# Altium PCB SEC(70x35mm).PcbDoc (part 2 of 2)
Units mil, origin at the board's own origin, x right, y up, seen from the top; angles counter-clockwise.
Board outline 2767.39 x 1392.75 mil, 4 copper layers (Top Layer, GND, POWER, Bottom Layer), stack 25.134 mil thick; 146 components, 106 nets, 504 pads, 259 vias.
Unrouted connection lines stored in the file: 8.
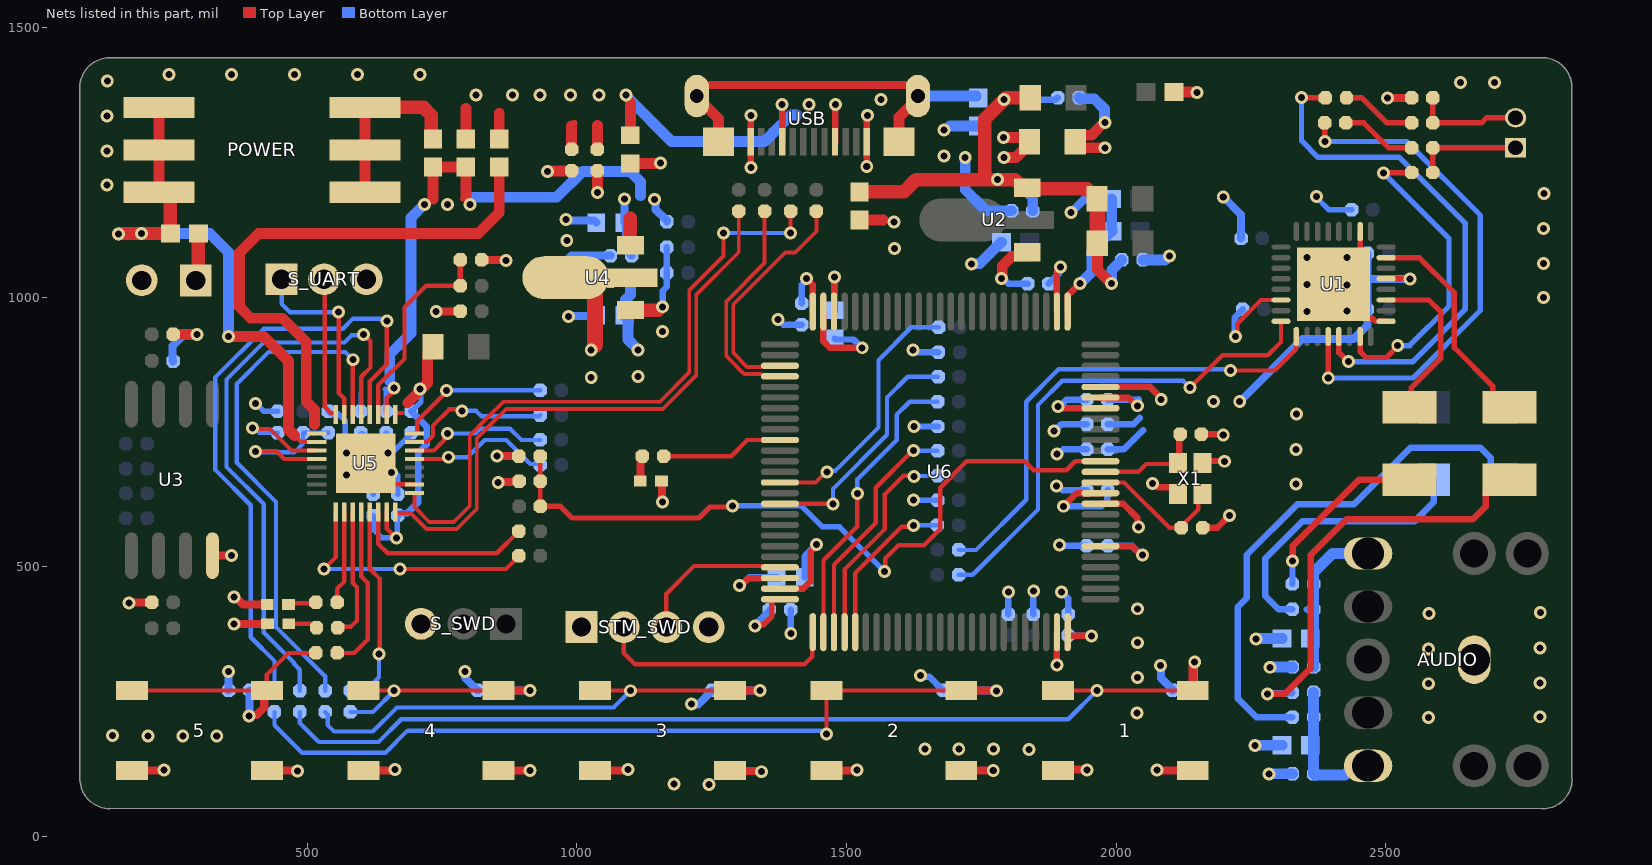
[diagram p4: the nets of this part, all layers, seen from the top]

## Via types
v1: diameter 24, hole 13, Top Layer to Bottom Layer, 259 vias

## Nets (pads, with @x,y where several pads share a name; then routed paths per layer and width w, separated by ;. In a path a pad name is that pad's centre, name@x,y a point inside that pad or via, vN(x,y) a via of type N, cw(c..) or ccw(c..) an arc to the next point about the centre after c; other vN are vias at no path point) (continued)
GND: 1.3 1.4 2.3 2.4 3.3 3.4 4.3 4.4 5.3 5.4 BAT.2 C8.2 C9.2 C10.2 C11.2 C12.2 C13.2 C14.2 C15.2 C16.2 C17.2 C18.2 C19.2 C20.1 C21.1 C22.2 C23.2 C24.1 C25.2 C26.2 C27.2 C28.2 C29.2 C30.2 C31.2 C32.2 C33.2 C34.2 C35.2 C36.2 C37.2 C38.2 C39.2 C40.2 C41.2 C42.2 C43.2 C44.2 C45.2 C46.2 C47.2 C48.2 C49.2 C50.2 FB1.1 LED2.2 LED3.2 LED4.2 R2.2 R15.2 R16.2 R25.2 R26.1 R29.1 R35.2 R47.2 R56.1 R61.2 R63.2 S_SWD.3 S_UART.3 STM_SWD.1 U1.6 U1.21 U2.1 U3.4 U4.1 U5.18 U5.33 U6.10 U6.19 U6.26 U6.49 U6.74 U6.99 USB.A1 USB.A12 X1.2 X1.4 | length 5663.3
  Top Layer w8: U5.33@647.37,652.63 U5.18@698.55,652.63 ; v1(2221.37,926.56) 2224.43,929.62 2224.43,950.43 2268.47,994.47 U1.6@2305.56,994.47
  Top Layer w10: U5.33@608,692 U5.33@647.37,652.63 ; v1(739,973) v1@739.5,973.5 ; C25.2@783.12,973.5 C25.2@783.62,974 ; v1(945,1233) v1@945.82,1233.82 ; C23.2@989.18,1233.82 C23.2@990,1234.64 ; v1@1322,1334 v1@1322.2,1333.8 ; v1@1322.2,1241.17 v1@1322.36,1241 ; v1@1537,1330 v1@1537.2,1329.8 ; U1.21@2500.44,1033.84 v1(2545,1033.84)
  Top Layer w12: v1@1322.2,1241.17 USB.A1@1322.2,1287.74 v1@1322.2,1333.8 ; U6.74@1376.28,459.33 1419.33,459.33 1433.55,473.55 1433.55,528.08 1443.79,538.31 v1(1443.79,541.11) ; U6.49@1456.99,973.1 1456.99,918.01 1469,906 v1(1529,906) ; v1@1537.2,1247.75 USB.A12@1537.2,1287.74 v1@1537.2,1329.8 ; FB1.1@1831.35,1296 FB1.1@1839.35,1288 ; v1@1890.06,316.41 U6.99@1890.06,378.62 ; v1(1892,797) 1895.25,797 1898.28,793.97 U6.19@1970.77,793.97 ; U6.26@1909.75,973.1 1909.75,1002.44 1932.3,1025 v1(1933.12,1025) ; U6.10@1970.77,616.81 1970.86,616.71 2013.1,616.71 2039.44,590.37 v1@2039.44,576.61 ; v1(2067,654) 2070.25,654 2076.55,647.7 2103.9,647.7 2114.63,636.97 X1.2@2114.63,635 ; C33.2@2158,746 v1@2197,746 ; X1.4@2159.9,692.09 2163.82,696 v1@2202,696 ; C32.2@2160.38,572.44 2187.44,572.44 v1(2210,595)
  Top Layer w15: v1@167,434 R26.1@211.62,434 ; 5.3@175.09,122 v1@231,122 ; U3.4@324,520.51 v1@364,520.51 ; v1(364,394) LED3.2@426,394 ; v1(364,444) 366.44,444 380.44,430 LED2.2@425.63,430 ; 5.4@425,122 477,122 v1@478,123 ; 4.3@604.32,122 v1@656.28,122 ; v1@739.5,973.5 C25.2@783.12,973.5 ; R47.2@823,1069 v1@864.98,1069 ; v1(854,656) 855.37,657.37 891.25,657.37 R61.2@892.62,658.74 ; 4.4@854.23,122 905.19,122 v1@906,122.81 ; 3.3@1033.55,122 1092.17,122 v1@1093.17,123 ; v1@1150.5,976 1156.5,982 v1(1158.94,982) ; LED4.2@1156.92,658.87 1157.66,658.14 1157.66,620.73 v1(1158.39,620) ; 3.4@1283.45,122 1284.64,120.81 v1@1338,120.81 ; 2.3@1462.77,122 v1@1516.04,122 ; 2.4@1712.68,122 1767.81,122 v1@1769,120.81 ; 1.3@1892,122 1893.62,123.62 v1@1941,123.62 ; v1@2080,122.62 2080.62,122 1.4@2141.91,122
  Top Layer w20: R25.2@251,931 v1@288,931 ; v1@945.82,1233.82 C23.2@989.18,1233.82 ; v1(1038,1194.2) C22.2@1038,1234.64 ; C24.1@1099,1247.75 v1@1152.19,1247.75 ; v1@1788.72,1034.45 1787.77,1035.41 1787.77,1036.3 1788.72,1037.25 1788.72,1057.72 1806.79,1075.79 1837,1075.79 U2.1@1844,1082.79 ; v1(1791,1296) FB1.1@1831.35,1296 ; v1(1791.63,1259) 1814.29,1259 1839.35,1284.06 FB1.1@1839.35,1288
  Top Layer w25: U4.1@1099,976 v1@1150.5,976
  Bottom Layer w10: v1(404,803) 418.65,788.35 444.65,788.35 R35.2@445,788 ; C26.2@539,788 543.18,783.82 557.18,783.82 570.19,770.81 570.19,713.22 v1(572.59,710.81) 576.38,710.81 582.24,716.67 586,716.67 ; C29.2@622,634 622,666.26 ; v1@646,710.74 646.91,711.65 646.91,717.28 646,718.19 C28.2@646,747.36 ; 662.72,716.6 C31.2@693,746.88 ; C30.2@668,634.38 668,670.1 ; v1@1624.24,623 R16.2@1668.62,623 ; v1(1681,1310) 1684.79,1310 1691.79,1317 ; 2465.62,1034.45 2466.23,1033.84
  Bottom Layer w12: v1(1158.94,982) 1158.94,1011.45 1166.62,1019.14 C45.2@1166.62,1045 R56.1@1166.62,1092 ; v1@1374,957 1382.26,948.74 C44.2@1416.69,948.74 ; v1@1396,378 1396.38,378.38 C39.2@1396.38,420.43 ; C35.2@1422.36,480.43 1422.36,519.69 v1(1443.79,541.11) ; C34.2@1477.69,923.17 1479.56,921.31 1512.69,921.31 1528,906 v1(1529,906) ; v1(1622.93,902) 1626.18,902 1630.18,898 R2.2@1670.31,898 ; v1(1625,760) R15.2@1668.62,760 ; v1(1637,298) 1639.3,295.7 1653.67,295.7 C47.2@1678.9,270.47 ; v1(1787,1034.45) 1790.25,1034.45 1799.7,1025 C43.2@1835.62,1025 ; R63.2@1800,412 v1@1800,452 ; v1@1887.31,753.06 1898.67,764.43 C37.2@1945.31,764.43 ; v1(1889,650) 1892.25,650 1900.82,641.43 C42.2@1945.31,641.43 ; v1(1890,709) 1893.25,709 1901.67,717.43 C38.2@1945.31,717.43 ; v1(1892,797) 1895.25,797 1908.25,810 C36.2@1945.31,810 ; v1@1898.67,538.43 C41.2@1945.31,538.43 ; v1@1900,452 1910.69,441.31 C40.2@1910.69,412 ; v1(2221.37,926.56) 2220,927.93 2220,962 2234.31,976.31 C9.2@2234.31,977
  Bottom Layer w15: C17.2@251,881 250,882 250,909 269.97,928.97 291.3,928.97 293.29,930.96 v1(295.72,930.96) ; C50.2@354,270.47 v1@354,305 ; 600.76,710.81 600.76,743.62 601.16,744.02 C27.2@602.24,744.02 ; v1@792,305 792,294.47 C49.2@815.99,270.47 ; v1(980,1144) 981.72,1142.28 1031.47,1142.28 C21.1@1035.75,1138 ; v1(984.4,964.06) 985.37,965.03 1034.78,965.03 C20.1@1035.75,966 ; 984.4,1071.74 989.66,1077 C19.2@1061.99,1077 ; 1006,1039 1012,1039 1022,1029 C18.2@1061.99,1029 ; v1@1212,245 1225.15,245 C48.2@1250.62,270.47 ; v1(1916,1157) 1941,1182 C11.2@1991,1182 ; v1@2083,313 2083,293.95 2104.62,272.33 C46.2@2104.62,270.47 ; v1(2198.44,1185.94) 2231.62,1152.75 C16.2@2231.62,1109 ; v1(2229,806) 2345,922 2439.78,922 2465.62,947.84 C13.2@2465.62,977 2465.62,1034.45 C12.2@2465.62,1081 ; 2466.23,1033.84 v1(2545,1033.84)
  Bottom Layer w20: 1691.79,1317 R29.1@1744,1317 ; v1(1720,1259) 1720,1199.06 1752.09,1166.97 1759.06,1160 C14.2@1805.99,1160 ; v1(1732,1061) 1732.77,1061.77 1746.48,1061.77 1786.5,1101.79 C15.2@1787,1101.79 ; v1(1933.12,1025) 1954.44,1046.32 1954.44,1084.94 1991.5,1122 C10.2@1992,1122 ; C11.2@1991,1182 1991.5,1181.5 C10.2@1991.5,1122.5 ; C8.2@2049.69,1069 2090.42,1069 2097.29,1075.87 v1(2098.37,1075.87)
  other v1: 1245,96 1179.69,96.75 1341.91,119.81 481.59,120.81 912.59,121.81 1771.94,121.76 234.59,122.81 1519.59,122.62 1945.59,122.62 2075.59,122.62 662.71,123.62 1094.59,123.62 1838,161.22 1645,161.97 1708,161.97 1772.69,161.97 204.31,186.12 269,186.12 332,186.12 139,186.86 2038.44,229 1212.06,245.37 2039.18,294.31 354.06,305.37 792.06,305.37 2082.34,316.41 1890.44,317.86 2039.18,359 1396.44,376.45 2039.18,422 169.59,432.81 1800.44,453.45 1898.44,453.45 359.59,520.81 1894.88,539.87 2041.44,573.88 1624.03,623.45 572.18,669.81 656.28,674.97 2200.44,695.53 649.59,710.81 2198.44,744.45 1884.75,751.45 2180,806 1158.94,936 1372.44,958.45 868.59,1067.81 981.07,1104.97 128.25,1208 1322.36,1240.13 1537.36,1242.13 1154.59,1248.34 1681,1262 128.25,1271 128.25,1335.69 1322.36,1337.13 1538.36,1337.13 1563.86,1366.61 129,1401 243.21,1413.05 359.71,1413.05 476.21,1413.05 592.71,1413.05 709.21,1413.05
GND_SIGNAL: AUDIO.1 C1.2 C2.2 C3.2 D1.1 D2.1 FB1.2 R8.2 R9.2 R14.1 U1.17 U1.26 U1.33 | length 787.2
  Top Layer w10: U1.26@2452.21,1121.44 2452.21,1073.21 U1.33@2403,1024 2465.91,961.09 2471.69,961.09 2471.77,961 2474.9,961 2480.8,955.1 U1.17@2500.44,955.1
  Top Layer w12: FB1.2@1924,1288 FB1.2@1935.11,1276.89
  Top Layer w15: v1@2505.11,1369.31 R14.1@2547.62,1369.31
  Top Layer w20: FB1.2@1924,1288 1924,1290.31 1933.69,1300 1953.92,1300 1977.92,1324 v1(1979,1324) ; FB1.2@1935.11,1276.89 v1(1979,1276.89) ; C3.2@2107,1380.4 2146.74,1380.4 v1@2148,1379.14
  Bottom Layer w10: v1@2370,1186 2394,1162 C2.2@2436.62,1162
  Bottom Layer w20: C1.2@1931.01,1370 1933.12,1367.89 1959.11,1367.89 1978.23,1348.77 1978.23,1324.77 v1(1979,1324) ; v1@2259.5,169 D2.1@2307.69,169 ; v1@2262,366.71 2307.4,366.71 D1.1@2307.69,367 ; v1@2285.5,116 R9.2@2326.68,116 ; v1@2291,314 R8.2@2326.68,314
  other v1: 2283.01,115.52 2257.01,168.52 2579.25,220 2785.56,221.73 2579.25,283 2785.56,284.73 2285.5,313.52 2579.25,347.69 2785.56,349.42 2259.5,366.23 2580,413 2786.3,414.73 2333.25,653 2333.25,717.69 2334,783 2353.95,973.3 2427.95,974.3 2792.58,999.36 2427.95,1022.3 2353.95,1023.76 2792.58,1062.36 2353.95,1073.3 2427.95,1073.3 2792.58,1127.05 2371.5,1186.52 2793.32,1192.36 2502.62,1368.82 2150,1379 2638.4,1398.28 2701.4,1398.28
GPIO1: R41.1 U5.29 | length 1083
  Top Layer w8: U5.29@600.13,782.55 600.13,852.39 617,869.26 617,918.19 v1(604.23,930.96)
  Bottom Layer w8: R41.1@486,270 486,309 476,319 476,321 419,378 419,616 350,685 350,847 418.81,915.81 568.81,915.81 581.97,928.97 602.24,928.97 v1(604.23,930.96)
GPIO2: R43.1 U5.28 | length 1178.2
  Top Layer w8: U5.28@615.87,782.55 615.87,843.46 647.37,874.96 v1(647.37,956)
  Bottom Layer w8: R43.1@439,270 439,325 395,369 395,614 329,680 329,851 419,941 565.78,941 584.78,960 634.68,960 635.62,959.06 644.31,959.06 v1(647.37,956)
GPIO3: R46.1 U5.30 | length 983.9
  Top Layer w8: U5.30@584.38,782.55 v1(584.38,883.81)
  Bottom Layer w8: R46.1@533,270 533,297 442,388 442,620 369,693 369,839 428,898 570.19,898 v1(584.38,883.81)
GPIO4: R49.1 U5.13 | length 381.3
  Top Layer w8: U5.13@615.87,601.45 615.87,496.13 634,478 v1@634,334
  Bottom Layer w8: R49.1@580,270 608,270 633,295 v1(633,338)
GPIO5: R51.1 U5.12 | length 308.3
  Top Layer w8: R51.1@555.38,340 587,340 612,365 612,470 600.13,481.87 U5.12@600.13,601.45
I2S3_CK: R54.2 U6.78 | length 443.2
  Top Layer w8: U6.78@1476.67,378.62 1476.67,503.67 1554,581 1554,646.49 1622.72,715.21 v1(1624.45,715.21)
  Bottom Layer w8: v1(1624.45,715.21) 1624.75,714.91 1668.32,714.91 R54.2@1668.62,714.6
I2S3_MCK: R58.2 U6.64 | length 481
  Top Layer w8: U6.64@1376.28,656.18 1442.19,656.18 v1@1459.02,673
  Bottom Layer w8: v1(1463.75,675.61) 1466.29,678.15 1479.15,678.15 1559,758 1559,883 1620,944 R58.2@1670.62,944
I2S3_nRESET: R59.2 U6.66 | length 446.2
  Top Layer w8: U6.66@1376.28,616.81 v1@1473,616.81
  Bottom Layer w8: v1(1474.74,616.61) 1474.74,644.32 1575,744.58 1575,814 1613.4,852.4 R59.2@1669.62,852.4
I2S3_SDI: R55.2 U6.79 | length 401.2
  Top Layer w8: U6.79@1496.36,378.62 1496.36,495 1571,569.64 1571,634.18 1605.2,668.38 v1@1627,668.38
  Bottom Layer w8: v1(1624.74,667.29) 1625.59,668.15 1667.77,668.15 R55.2@1668.62,669
I2S3_SDO: R57.2 U6.80 | length 300.2
  Top Layer w8: U6.80@1516.04,378.62 1516.04,488.04 1602,574 v1@1627,574
  Bottom Layer w8: v1(1624.24,576.61) 1624.43,576.81 1668.12,576.81 R57.2@1668.31,577
I2S3_WS: R53.2 U6.77 | length 545.3
  Top Layer w8: U6.77@1456.99,378.62 1456.99,511.99 1520,575 v1(1520,636)
  Bottom Layer w8: v1(1520,636) 1520,662 1593,735 1593,782 1617,806 R53.2@1668.62,806
LED: R65.1 U6.60 | length 230.3
  Top Layer w8: R65.1@1158.39,705 R65.1@1160.69,705 1286,705 1315.92,734.92 U6.60@1376.28,734.92
LEFT_OUT: AUDIO.2 D1.2 R1.2 R7.2 R8.1 | length 296.4
  Bottom Layer w10: 2351.9,421 R1.2@2353.69,419.21 ; 2353.34,421 R1.2@2353.69,421.34 ; AUDIO.2@2465.21,526.21 AUDIO.2@2467,524.43
  Bottom Layer w20: R8.1@2366.05,314 R1.2@2366.05,421 R7.2@2366.05,468 2366.05,489.39 2401.09,524.43 AUDIO.2@2467,524.43
Net1_1: 1.1 1.2 C46.1 R41.2 | length 1911.4
  Top Layer w8: 1.1@1891.91,270.47 v1(1964.35,270.47) 1.2@2141.91,270.47
  Top Layer w15: 1.2@2141.91,270.47 2141.91,317.3 2145.54,320.94 v1(2145.54,323.37)
  Bottom Layer w8: R41.2@486,230.62 486,210 521,175 632,175 674,217 1910.88,217 v1(1964.35,270.47)
  Bottom Layer w15: v1@2143,324 2144,323 C46.1@2144,270.47
Net2_1: 2.1 2.2 C47.1 R43.2 | length 1542.7
  Top Layer w8: v1@1463,190 1462.68,190.32 2.1@1462.68,270.47 2.2@1712.68,270.47
  Top Layer w15: 2.2@1712.68,270.47 1775.53,270.47 v1@1776,270
  Bottom Layer w8: R43.2@439,230.62 439,206 490,155 645,155 686,196 1452.44,196 1458.44,190 v1(1462.77,190)
  Bottom Layer w15: C47.1@1718.28,270.47 1718.55,270.2 1777.33,270.2 v1(1777.6,269.93)
Net3_1: 3.1 3.2 C48.1 R46.2 | length 981.5
  Top Layer w8: 3.1@1033.45,270.47 3.2@1283.45,270.47
  Top Layer w15: 3.2@1283.45,270.47 1283.61,270.31 1338.9,270.31 v1(1339.06,270.16)
  Bottom Layer w8: R46.2@533,230.62 537.59,226.03 537.59,206.41 549.69,194.31 621.31,194.31 666,239 1068,239 v1(1099,270)
  Bottom Layer w15: C48.1@1290,270.47 v1@1341.91,270.47
Net4_1: 4.1 4.2 C49.1 R49.2 | length 460.6
  Top Layer w8: 4.1@604.23,270.47 4.2@854.23,270.47
  Top Layer w15: 4.2@854.23,270.47 854.28,270.42 912.6,270.42 v1(912.65,270.37)
  Bottom Layer w8: R49.2@580,230.62 621.62,230.62 v1(661,270)
  Bottom Layer w15: C49.1@855.37,270.47 909.53,270.47 v1@910,270
Net5_1: 5.1 5.2 C50.1 R51.2 | length 503.3
  Top Layer w8: 5.1@175,270.47 5.2@425,270.47 425,300 465,340 R51.2@516,340
  Top Layer w15: v1(392,223) 393.72,224.72 405.72,224.72 420.04,239.04 420.04,265.52 5.2@425,270.47
  Bottom Layer w15: v1(392,223) 392.69,223.69 392.69,269.78 C50.1@393.38,270.47
NetBAT_1: BAT.1 R20.2 | length 89.1
  Top Layer w10: BAT.1@293,1031 BAT.1@298,1036
  Top Layer w25: BAT.1@298,1036 R20.2@298,1118
NetC4_2: C4.2 R1.1 | length 527.4
  Bottom Layer w12: R1.1@2326.68,421 2301,421 2276,446 2276,514.87 2345.13,584 2553,584 2589,620 C4.2@2589,661
NetC5_2: C5.2 R6.1 | length 981.6
  Bottom Layer w12: R6.1@2326.68,221 2260,221 2225,256 2225,425 2242,442 2242,522 2336,616 2441,616 2546,721 2675,721 2694.77,701.23 2694.77,682.23 C5.2@2716,661
NetC6_1: C6.1 R12.2 | length 140.7
  Top Layer w10: R12.2@2426,1323 2459,1323 2505.11,1276.89 C6.1@2547.62,1276.89
NetC6_2: C6.2 MIC.1 R11.2 | length 199.4
  Top Layer w10: R11.2@2587,1231 C6.2@2587,1276.89 MIC.1@2740.55,1276.89
NetC7_1: C7.1 R13.2 | length 139.8
  Top Layer w10: R13.2@2427,1369.31 2455.59,1369.31 2501.9,1323 C7.1@2547.62,1323
NetC7_2: C7.2 MIC.2 R14.2 | length 203.9
  Top Layer w10: R14.2@2587,1369.31 C7.2@2587,1323 2677,1323 2686.56,1332.56 MIC.2@2740.65,1332.56
NetC26_1: C26.1 R42.1 U5.4 | length 282.4
  Top Layer w8: v1(404,714) 443,714 457.13,699.87 U5.4@517.45,699.87
  Bottom Layer w8: v1(404,714) 406,712 476,712 492,728 R42.1@492,748.62 C26.1@539,748.62
NetC32_1: C32.1 U6.12 X1.3 | length 263.6
  Top Layer w8: U6.12@1970.77,656.18 2014.63,656.18 2098.37,572.44 C32.1@2121,572.44 2121,575 2152.37,606.37 2152.37,627.47 X1.3@2159.9,635
NetC33_1: C33.1 U6.13 X1.1 | length 206.1
  Top Layer w8: U6.13@1970.77,675.86 2040.86,675.86 2055.54,690.54 2113.08,690.54 X1.1@2114.63,692.09
  Top Layer w12: X1.1@2114.63,692.09 2116.62,694.08 2116.62,744 C33.1@2118.62,746
NetC34_1: C34.1 U6.48 | length 125
  Top Layer w12: U6.48@1476.67,973.1 v1@1476.67,1036
  Bottom Layer w12: v1(1477.44,1037.45) 1477.57,1037.32 1477.57,975.55 C34.1@1477.69,975.43
NetC35_1: C35.1 U6.73 | length 155.3
  Top Layer w12: v1(1301.44,465.45) 1304.69,465.45 1318.25,479.01 U6.73@1376.28,479.01
  Bottom Layer w12: v1(1301.44,465.45) 1304.69,465.45 1319.66,480.43 C35.1@1370.11,480.43
NetCT1_1: CT1.1 U1.19 | length 311
  Top Layer w10: U1.19@2500.44,994.47 2579.53,994.47 2602,972 2602,886.88 2547.12,832 2547.12,799.29 CT1.1@2543.83,796
NetCT1_2: CT1.2 R7.1 | length 337.9
  Top Layer w12: v1(2327,510.45) 2327,538 2450,661 CT1.2@2543.83,661
  Bottom Layer w12: R7.1@2326.68,468 2326.84,468.16 2326.84,510.29 v1(2327,510.45)
NetCT2_1: CT2.1 U1.23 | length 411.4
  Top Layer w10: U1.23@2500.44,1073.21 2561.79,1073.21 2627,1008 2627,906 2697.86,835.14 2697.86,821 2722.86,796 CT2.1@2729,796
NetCT2_2: CT2.2 R10.1 | length 799.7
  Top Layer w12: v1@2278.69,264.31 2312.82,264.31 2361,312.5 2361,522 2427,588 2661.48,588 2685,611.52 2685,637 2709,661 CT2.2@2729,661
  Bottom Layer w12: v1(2280.51,263.83) 2282.1,265.42 2325.09,265.42 R10.1@2326.68,267
NetLED2_1: LED2.1 R39.1 | length 52.7
  Top Layer w8: LED2.1@465,430 467,432 514,432 R39.1@516,434
NetLED3_1: LED3.1 R40.1 | length 54.5
  Top Layer w8: LED3.1@465.37,394 506.09,394 513.09,387 R40.1@517,387
NetLED4_1: LED4.1 R65.2 | length 46.5
  Top Layer w15: LED4.1@1117.55,658.87 1117.55,699.39 1118.17,700 1118.17,704.25 R65.2@1117.55,704.86
NetPOWER_3: POWER.3 POWER.4 R28.1 | length 331.9
  Top Layer w10: R28.1@730,1296 R28.1@733,1293
  Top Layer w20: POWER.4@607,1194.2 POWER.4@607,1272.94 POWER.3@607,1351.68
  Top Layer w25: POWER.3@607,1351.68 715.45,1351.68 730,1337.13 R28.1@730,1296
NetR4_2: R4.2 U1.8 | length 939.6
  Top Layer w8: v1(2137,832) 2197,892 2281,892 2305.56,916.56 U1.8@2305.56,955.1
  Bottom Layer w8: R4.2@1707.69,485 1734,485 1855,606 1855,800 1900,845 2124,845 v1(2137,832)
NetR5_2: R5.2 U1.9 | length 911.7
  Top Layer w8: v1(2212,864) 2294,864 2334.1,904.1 U1.9@2334.1,926.56
  Bottom Layer w8: R5.2@1707.69,531 1740,531 1833,624 1833,806 1893,866 2210,866 v1(2212,864)
NetR11_1: R11.1 U1.15 | length 586.1
  Top Layer w10: U1.15@2452.21,926.56 2452.21,898.79 2463,888 2501,888 2522,909 v1(2522,910) ; v1(2496,1230) 2496.5,1230.5 2547.12,1230.5 R11.1@2547.62,1231
  Bottom Layer w10: v1(2496,1230) 2617,1109 2617,983 2544,910 v1(2522,910)
NetR12_1: R12.1 U1.12 | length 966.3
  Top Layer w10: R12.1@2386.62,1323 2386.81,1322.81 2386.81,1288.75 v1(2387,1288.56) ; v1(2393.16,850) U1.12@2393.16,926.56
  Bottom Layer w10: v1(2387,1288.56) 2538.44,1288.56 2675,1152 2675,975 2550,850 v1(2393.16,850)
NetR13_1: R13.1 U1.13 | length 953.8
  Top Layer w10: v1@2344,1369.44 2387.49,1369.44 R13.1@2387.62,1369.31 ; U1.13@2412.84,926.56 2412.84,897.02 v1@2428,881.86
  Bottom Layer w10: v1@2343.5,1366.24 2343.5,1290.05 2374.56,1259 2524.97,1259 2647,1136.97 2647,977 2550.3,880.3 v1(2430.95,880.3)
  other v1: 2343.5,1370.24
NetR29_2: R29.2 USB.1 USB.2 USB.3 USB.4 | length 712.4
  Top Layer w15: USB.4@1222.2,1372.74 1222.2,1379.14 1236.05,1393 1618.34,1393 1632.2,1379.14 USB.3@1632.2,1372.74
  Top Layer w20: USB.4@1234,1359 1262.2,1330.8 USB.2@1262.2,1287.74 ; USB.1@1597.2,1287.74 1597.2,1333.48 USB.3@1622.72,1359
  Bottom Layer w10: R29.2@1740.26,1372.74 R29.2@1744,1369
  Bottom Layer w20: USB.3@1632.2,1372.74 R29.2@1740.26,1372.74
NetR35_1: R35.1 U5.3 | length 187.1
  Top Layer w8: v1(398,757) 399.5,755.5 430.5,755.5 470.38,715.62 U5.3@517.45,715.62
  Bottom Layer w8: v1(398,757) 402.33,757 410.71,748.62 R35.1@445,748.62
NetR36_2: R36.2 U5.23 | length 275.6
  Top Layer w8: U5.23@698.55,731.37 U5.23@698.55,731.37 721.73,731.43 733,742.7 733,761.69 763.37,792.06 783.94,792.06 v1(787,789)
  Bottom Layer w8: v1(787,789) 813,789 823,779 929.62,779 R36.2@931.62,781
NetR37_2: R37.2 U5.24 | length 281.3
  Top Layer w8: U5.24@698.55,747.12 703.94,747.12 704,747.18 704,770.49 758,824.49 v1(758,827)
  Bottom Layer w8: v1(758,827) R37.2@931.62,827
NetR38_2: R38.2 U5.9 | length 485.9
  Top Layer w8: v1(531,495.87) 552.88,517.76 U5.9@552.88,601.45 ; v1(672,495.87) 868.19,495.87 R38.2@892.31,520
  Bottom Layer w8: v1(531,495.87) v1(672,495.87)
NetR44_1: R44.1 R47.1 U5.27 | length 386.7
  Top Layer w8: U5.27@631.62,782.55 631.62,836.67 680,885.05 680,981 720,1021 R44.1@783.62,1021
  Top Layer w10: R44.1@783.62,1021 R47.1@783.62,1069
NetR45_2: R45.2 U5.22 | length 262.2
  Top Layer w8: U5.22@698.55,715.62 734.62,715.62 753.86,734.86 753.86,736.85 759.67,742.66 v1(759.67,746.99)
  Bottom Layer w8: v1(759.67,746.99) 811.25,746.99 820.26,756 876,756 897,735 R45.2@931.62,735
NetR48_2: R48.2 U5.21 | length 266.7
  Top Layer w8: U5.21@698.55,699.87 754.54,699.87 757.67,703 v1(762,703)
  Bottom Layer w8: v1(762,703) 797,703 829,735 869,735 913.45,690.55 930.07,690.55 R48.2@931.62,689
NetR50_2: R50.2 U5.14 | length 343.9
  Top Layer w8: U5.14@631.62,601.45 631.62,542.38 649,525 851.31,525 R50.2@892.31,566
RIGHT_OUT: AUDIO.3 D2.2 R6.2 R9.1 R10.2 | length 259.7
  Bottom Layer w20: R10.2@2366.05,267 R6.2@2366.05,221 2366.05,169 R9.1@2366.05,116 2368.05,114 2424.45,114 2441.18,130.72 AUDIO.3@2467,130.72
SEC_DN: R19.1 U5.17 | length 1188.6
  Top Layer w7: U5.17@698.55,636.88 698.55,610.64 726.23,582.96 771.57,582.96 801,612.38 801,743.38 832.31,774.69 863.3,805.69 1153.55,805.69 1208,860.14 1208,1012.19 1271.69,1075.87 v1(1271.69,1119) ; v1(1396,1119) R19.1@1396,1159.31
  Bottom Layer w7: v1(1271.69,1119) v1(1396,1119)
SEC_DP: R23.1 U5.16 | length 1103.7
  Top Layer w7: U5.16@663.12,601.45 663.12,600.12 663.56,599.68 691.12,599.68 720.85,569.96 776.96,569.96 814,607 814,738 842.51,766.51 868.69,792.69 1158.94,792.69 1221,854.75 1221,1004 1300,1083 R23.1@1300,1159.31
ST_LED1: R39.2 U5.10 | length 172.9
  Top Layer w8: R39.2@555.38,434 555.38,459.38 568.63,472.63 U5.10@568.63,601.45
ST_LED2: R40.2 U5.11 | length 245.6
  Top Layer w8: R40.2@556.38,387 558.26,388.88 580.88,388.88 592,400 592,462 584.38,469.62 U5.11@584.38,601.45
STM_DN: R21.1 U6.53 | length 435.9
  Top Layer w7: U6.53@1375.45,874.93 1372.31,871.79 1342.32,871.79 1341.03,870.5 1315.5,870.5 1290,896 1290,986.62 1386.17,1082.79 1404.79,1082.79 1444,1122 R21.1@1444,1159.31
STM_DP: R27.1 U6.54 | length 412.3
  Top Layer w7: R27.1@1348,1159.31 1348,1063 1277,992 1277,890.62 1283.81,883.81 1306.31,861.31 1310.12,857.5 1340.98,857.5 1344.53,853.95 1374.15,853.95 U6.54@1375.45,855.25
STM_NRST: R34.1 R60.1 R61.1 U6.14 | length 1353.8
  Top Layer w8: R60.1@931.69,705 931.84,704.84 931.84,612.16 R34.1@932,612 ; v1(1570,491) 1571.72,492.72 1571.72,515 1596.72,540 1643.84,540 1673.52,569.68 1673.52,646.49 1722.58,695.55 1830.17,695.55 1846.72,679 1907.45,679 1924,695.55 U6.14@1970.77,695.55
  Top Layer w10: R34.1@932,612 969.52,612 991.15,590.37 1226.31,590.37 1246.57,610.64 v1@1286,610.64
  Bottom Layer w10: v1(1288.44,612.82) 1416.18,612.82 1455,574 1487,574 v1(1570,491)
SWCLK: STM_SWD.2 U6.76 | length 460.1
  Top Layer w8: STM_SWD.2@1086.88,388 1086.88,340 1107.88,319 1422,319 1436.47,333.47 1436.47,345.56 1436.58,345.67 1436.58,381.08 U6.76@1436.47,381.18
SWDIO: STM_SWD.3 U6.72 | length 292.8
  Top Layer w8: STM_SWD.3@1165.62,388 1165.62,449.62 1217.26,501.26 U6.72@1375.45,501.26
UART0_RX: S_UART.2 U5.32 | length 264.7
  Top Layer w8: S_UART.2@531,1033 532.42,1031.58 532.42,796.58 544,785 552.82,785 552.88,784.94 U5.32@552.88,782.55
UART0_TX: S_UART.1 U5.31 | length 351.8
  Top Layer w8: v1(557.87,972.38) 558.26,972 558.26,821.94 568.63,811.57 U5.31@568.63,782.55
  Bottom Layer w8: S_UART.1@452.26,1033 452.26,987.74 468,972 557.49,972 v1(557.87,972.38)
VBAT: POWER.1 POWER.2 R20.1 U5.2 | length 993.1
  Top Layer w8: 476.25,743.25 488.13,731.37 U5.2@517.45,731.37
  Top Layer w10: POWER.2@224.95,1194.2 231.31,1194.2 POWER.2@246,1179.51
  Top Layer w20: POWER.2@224.95,1194.2 POWER.2@224.95,1272.94 POWER.1@224.95,1351.68 ; v1(354,927) 419.31,927 465,881.31 465,754.5 476.25,743.25
  Top Layer w24: v1(150,1117) 151,1118 R20.1@246,1118
  Top Layer w25: R20.1@246,1118 POWER.2@246,1179.51
  Bottom Layer w20: v1(192.59,1117.81) 319.19,1117.81 354,1083 v1(354,927)
VBUS: C22.1 C23.1 C24.2 R17.1 R18.1 USB.A4 USB.A9 | length 784.1
  Top Layer w10: 794,1349.95 798,1353.95 ; 856,1340.84 860,1344.84 ; 990,1317 996,1323 ; 1036,1320 1038,1318 ; USB.A9@1478.56,1287.74 USB.A9@1478.78,1287.96 ; v1@1478.78,1356.78 v1(1479,1357)
  Top Layer w12: USB.A4@1380.83,1287.74 v1@1380.83,1359 ; USB.A9@1478.78,1287.96 v1@1478.78,1356.78
  Top Layer w20: R18.1@794,1293 794,1349.95 ; R17.1@856,1293 856,1340.84 ; C23.1@990,1274.01 990,1317 ; C22.1@1038,1274.01 1038,1318 ; C24.2@1099,1300 1099,1361
  Bottom Layer w20: v1@1094,1370 1175.44,1288.56 1347.56,1288.56 1396.51,1337.51 1408,1337.51
  other v1: 1379.83,1357 1430,1357 812.82,1375 880.59,1375 931.62,1375 988,1375 1041,1375 1091,1375
VCC3.3V: C18.1 C20.2 C36.1 C37.1 C38.1 C39.1 C40.1 C41.1 C42.1 C43.1 C44.1 L2.1 R60.2 R62.2 STM_SWD.4 U4.2 U6.6 U6.11 U6.20 U6.21 U6.27 U6.50 U6.75 U6.100 | length 1660.9
  Top Layer w10: v1(1330,390) 1332.09,392.09 1346.09,392.09 1361.29,407.29 1361.29,438.8 1362.12,439.64 U6.75@1376.28,439.64
  Top Layer w12: v1@1427,1033 1437.3,1022.7 U6.50@1437.3,973.1 ; 1567.82,1143 1571,1146.18 ; v1@1587.5,1138.5 v1(1588,1139) ; U6.27@1890.06,973.1 1890.06,1045.81 1897,1052.75 v1(1897,1056) ; v1@1904,614 1926.4,636.4 1970.67,636.4 U6.11@1970.77,636.49 ; U6.100@1909.75,378.62 1909.75,372.09 1909.84,372 v1@1950,372 ; U6.6@1970.77,538.07 2029.69,538.07 2045.75,522 v1(2049,522) ; U6.20@1970.77,813.66 2022.34,813.66 v1@2036,800 ; U6.21@1970.77,833.34 2062.66,833.34 v1@2087,809
  Top Layer w15: v1(851.31,705) R60.2@892.31,705 ; U4.2@979,1036 1000.18,1036 U4.2@1030.21,1005.97 ; v1(1026.44,902) 1026.44,904.44 v1@1033.45,911.45
  Top Layer w20: L2.1@1524,1143 1567.82,1143
  Top Layer w30: v1@1033.45,911.45 U4.2@1033.45,1025
  Bottom Layer w10: C39.1@1358.61,418.82 1360.01,420.22 C39.1@1360.01,420.43
  Bottom Layer w12: v1(1330,390) 1330,391.71 1357,418.71 C39.1@1357,420.43 ; C44.1@1416.69,988.11 1416.69,1022.46 1425.44,1031.2 v1(1425.44,1034.45) ; R62.2@1846,412 1846.5,412.5 1846.5,454.5 v1(1847,455) ; C43.1@1875,1025 1894.7,1044.7 1894.7,1053.7 v1(1897,1056) ; v1(1902.44,612.09) 1973.09,612.09 1983.45,622.45 1983.45,640.19 C42.1@1984.69,641.43 ; C40.1@1910.69,372.62 1911.28,372.04 1953.85,372.04 v1(1954.44,371.45) ; C41.1@1984.69,538.43 2029.33,538.43 2045.75,522 v1(2049,522) ; C38.1@1984.69,717.43 2014.05,717.43 2049.69,753.06 ; C37.1@1984.69,764.43 2032.43,764.43 2044,776 ; C36.1@1984.69,810 2040.99,810 2041.44,810.45
  Bottom Layer w20: C18.1@1101.36,1029 1099.26,1026.89 1099.26,1004.26 1090,995 1090,968 C20.2@1088,966 1094.5,959.5 1094.5,921.46 1112.88,903.08 v1(1112.88,902)
  other v1: 2039.44,798.45 2083.44,810.45 1026.44,850.45 1112.88,852.4 1589,1090
VCC_CAHRGE: R17.2 U5.1 | length 1017.3
  Top Layer w8: U5.1@508,747.18 508.06,747.12 U5.1@517.45,747.12
  Top Layer w20: 513.42,763.46 513.42,791.07 498,806.49 498,916.81 453.96,960.85 395.15,960.85 374,982 374,1082 410,1118 817,1118 856,1157 R17.2@856,1241
VCC_MAIN: C19.1 C21.2 C27.1 C28.1 R18.2 R28.2 R52.2 U4.3 U5.26 | length 1261.9
  Top Layer w8: U5.26@647.37,782.55 647.37,813.04 661,826.67 v1(661,831)
  Top Layer w10: 733,1181.81 735.3,1179.51 ; 787.9,1181.81 794,1187.91
  Top Layer w15: 1097.18,1148 1099,1146.18
  Top Layer w20: 733,1181.81 R28.2@733,1241 R18.2@794,1241 794,1187.91
  Top Layer w25: U4.3@1099,1096 1099,1146.18
  Bottom Layer w8: C27.1@599,785.22 599,822.22
  Bottom Layer w10: 644.31,829.48 646,827.79 C28.1@646,788
  Bottom Layer w15: v1(1087.85,1182.18) 1087.93,1182.11 1087.93,1138.07 C21.2@1088,1138 1091,1135 1091,1107 1098.22,1099.78 1098.22,1080.14 C19.1@1101.36,1077 ; v1(1144.06,1181.37) 1145.78,1179.65 1145.78,1162.69 1166.62,1141.86 R52.2@1166.62,1140
  Bottom Layer w20: 653,844 653,894 692,933 692,1147 v1(717,1172) ; 797,1185 962,1185 1010,1233 1099,1233 1118,1214 1118,1188
  other v1: 759.67,1172 802,1172
VDAC_3V3: C1.1 C8.1 C14.1 L1.1 L2.2 L3.1 L4.1 U2.3 | length 1094.8
  Top Layer w12: L4.1@1964.35,1182 L4.1@1965,1181.35
  Top Layer w20: L3.1@1965,1100 1965,1051 v1(1991,1025)
  Top Layer w25: L2.2@1524,1195 1605.72,1195 1628.72,1218 1756,1218 ; U2.3@1836,1202.79 1831.29,1207.5 1822.5,1207.5 1812,1218 1756,1218 ; L1.1@1840.72,1369.31 1794.94,1369.31 1756,1330.37 1756,1218 ; U2.3@1846.29,1200.5 1945.85,1200.5 1953.23,1193.12 1957.17,1193.12 1964.35,1185.94 L4.1@1964.35,1182
  Top Layer w30: L3.1@1965,1100 L4.1@1965,1181.35
  Bottom Layer w12: v1(1791.63,1366) 1878.1,1366 1878.34,1366.24 1887.87,1366.24 C1.1@1891.63,1370
  Bottom Layer w20: v1(1779.75,1218) 1780.52,1217.23 1812.77,1217.23 1845.36,1184.64 C14.1@1845.36,1160 ; v1(1991,1025) 1991.77,1025.77 1991.77,1050.06 2010.31,1068.61 C8.1@2010.31,1069
VDD3V3: C29.1 C30.1 C31.1 L5.1 U5.15 U5.25 | length 593.3
  Top Layer w8: U5.15@647.37,601.45 647.37,570.63 v1(665,553) ; U5.25@663.18,785 675.51,785
  Top Layer w20: 686.29,804 723,840.71 723,882.66 723.31,882.98 723.31,898.31 L5.1@733,908
  Bottom Layer w10: C29.1@622,594.62 622,570 638,554 664,554 v1(665,553) 666.5,554.5 666.5,593.5 C30.1@668,595 ; C31.1@693,788 710.7,805.7 710.7,827.32 v1(708.55,829.48)
  Bottom Layer w12: C30.1@668,595 671.76,598.76 684.94,598.76 706,619.82 706,711.45 721,726.45 721,760 C31.1@693,788
pads on no net: "AUDIO. " AUDIO.4 AUDIO.5 U1.10 U1.11 U1.14 U1.16 U1.20 U1.22 U1.28 U1.30 U6.1 U6.2 U6.3 U6.4 U6.5 U6.7 U6.8 U6.9 U6.15 U6.16 U6.17 U6.18 U6.22 U6.23 U6.24 U6.25 U6.32 U6.33 U6.34 U6.36 U6.37 U6.38 U6.39 U6.40 U6.41 U6.42 U6.43 U6.44 U6.45 U6.46 U6.47 U6.51 U6.52 U6.55 U6.56 U6.57 U6.58 U6.59 U6.61 U6.62 U6.63 U6.65 U6.67 U6.70 U6.71 U6.81 U6.82 U6.83 U6.84 U6.85 U6.86 U6.87 U6.88 U6.89 U6.90 U6.91 U6.95 U6.96 U6.97 U6.98 USB.A2 USB.A3 USB.A5 USB.A8 USB.B10 USB.B11
copper on no net: | length 8221.2
  Top Layer w10: 83.02,102.74 83.02,1388.74 cw(c133.02,1388.74) 133.02,1438.74 ; 83.35,106.39 ccw(c133.35,106.39) 133.35,56.39 ; 133.02,56.74 2797.02,56.74 ; 136,1438.74 2797,1438.74 ; 2790.02,1438.74 cw(c2790.02,1388.74) 2840.02,1388.74 ; 2790.38,56.02 ccw(c2790.38,106.02) 2840.38,106.01
  Top Layer w12: 2840.02,97.74 2840.01,1393.74

## Polygon pours and split planes (outlines as drawn)
GND on Bottom Layer "GND_L04_P002" (solid, pour order 2): 124.01,1418.01 100,1394 100,105 125,80 2164,80 2177,67 2180,70 2180,526 2257.01,603.01 2257.01,875.99 2231,902 2231,1178.44 2188.44,1221 1906,1221 1879,1248 1879,1418.01
GND_SIGNAL on Bottom Layer "GND_SIGNAL_L04_P004" (solid, pour order 4): 1910.12,1412 1910.12,1257.88 1920,1248 2211,1248 2260.16,1198.84 2260.16,917.84 2285,893 2285,593 2207,515 2207,84 2800,84 2819,103 2819,1390 2796.52,1412
GND_SIGNAL on Top Layer "GND_SIGNAL_L01_P003" (solid, pour order 3): 1910.12,1418.01 1910.12,1257.88 1920,1248 2211,1248 2260.16,1198.84 2260.16,917.84 2285,893 2285,593 2207,515 2207,76 2799,76 2831,108 2831,1387 2795,1423
GND on Top Layer "GND_L01_P000" (solid, pour order 0): 126,1430 95,1399 95,95 122,68 2176,68 2177,67 2180,70 2180,526 2257.01,603.01 2257.01,875.99 2231,902 2231,1178.44 2188.44,1221 1906,1221 1879,1248 1879,1421
VBUS on POWER (split plane): 1622.11,1292.09 1270,1292.09 1267.39,1291.74 1265.67,1291.03 1264.96,1290.73 1262.87,1289.13 1222.82,1249.09 756.09,1249.09 756.09,1423.65 1622.11,1423.65
VCC_MAIN on POWER (split plane): 1162.91,1077.09 1041.09,1077.09 1041.09,1113 1040.74,1115.61 1039.73,1118.04 1038.13,1120.13 1036.04,1121.73 1033.61,1122.74 1031,1123.09 677.09,1123.09 677.09,1228.91 1162.91,1228.91
GND_SIGNAL on POWER (split plane): 2795.86,1423.32 2797.13,1422.94 2797.12,1422.92 2799.07,1422.53 2803.41,1421.06 2807.51,1419.04 2811.32,1416.5 2814.76,1413.48 2817.77,1410.04 2820.32,1406.23 2822.34,1402.13 2823.81,1397.79 2824.71,1393.3 2824.71,1393.25 2824.73,1393.25 2824.86,1391.91 2824.92,1391.73 2824.93,1391.58 2824.93,1388.7 2824.93,107.89 2825.12,105.98 2825.27,104.44 2825.15,102.63 2824.53,98.75 2824.18,96.96 2822.7,92.62 2820.68,88.52 2818.14,84.71 2815.12,81.27 2811.68,78.26 2807.87,75.71 2803.77,73.69 2799.43,72.22 2794.95,71.32 2792.65,71.17 2792.43,71.21 2791.7,71.43 2790.49,71.55 2789.3,71.76 2788.54,71.74 2787.78,71.82 2215.52,71.74 2204.09,83.18 2204.09,517.93 2278.13,591.97 2279.74,594.06 2280.74,596.5 2281.09,599.11 2281.09,886 2280.74,888.61 2280.45,889.32 2279.74,891.04 2278.13,893.13 2256.09,915.18 2256.09,1185 2255.74,1187.61 2255.24,1188.83 2254.74,1190.04 2253.13,1192.13 2203.13,1242.13 2201.04,1243.73 2198.61,1244.74 2196,1245.09 1915.18,1245.09 1904.09,1256.18 1904.09,1423.65 2794.55,1423.65
VCC3.3V on POWER (split plane): 1883.91,1252 1884.26,1249.39 1885.27,1246.96 1886.87,1244.87 1903.87,1227.87 1905.96,1226.27 1908.39,1225.26 1911,1224.91 2191.82,1224.91 2235.91,1180.82 2235.91,911 2236.26,908.39 2237.26,905.96 2238.87,903.87 2260.91,881.82 2260.91,603.28 2186.87,529.24 2185.26,527.15 2184.26,524.72 2183.91,522.11 2183.91,79 2184.26,76.39 2185.26,73.96 2186.87,71.87 2187,71.74 657.09,71.54 657.09,452.91 768,452.91 770.61,453.26 773.04,454.26 775.13,455.87 776.74,457.96 777.74,460.39 778.09,463 778.09,491 777.74,493.61 777.09,495.19 777.09,841.91 956,841.91 958.61,842.26 961.04,843.26 963.13,844.87 964.74,846.96 965.74,849.39 966.09,852 966.09,985 965.74,987.61 964.74,990.04 963.13,992.13 961.04,993.74 958.61,994.74 956,995.09 920.09,995.09 920.09,1102.91 1020.91,1102.91 1020.91,1067 1021.26,1064.39 1022.26,1061.96 1023.87,1059.87 1025.96,1058.27 1028.39,1057.26 1031,1056.91 1173,1056.91 1175.61,1057.26 1178.04,1058.27 1180.13,1059.87 1181.73,1061.96 1182.74,1064.39 1183.09,1067 1183.09,1228.91 1227,1228.91 1229.61,1229.26 1232.04,1230.27 1234.13,1231.87 1274.18,1271.91 1632.2,1271.91 1634.81,1272.26 1637.24,1273.27 1639.33,1274.87 1640.93,1276.96 1641.94,1279.39 1642.28,1282 1642.28,1423.65 1883.91,1423.65
3V3_M on POWER (split plane): 133.02,1423.65 735.91,1423.65 735.91,1249.09 667,1249.09 664.39,1248.74 661.96,1247.73 659.87,1246.13 658.26,1244.04 657.26,1241.61 656.91,1239 656.91,1113 657.26,1110.39 658.26,1107.96 659.87,1105.87 661.96,1104.27 664.39,1103.26 667,1102.91 899.91,1102.91 899.91,985 900.26,982.39 901.26,979.96 902.87,977.87 904.96,976.26 907.39,975.26 910,974.91 945.91,974.91 945.91,862.09 767,862.09 764.39,861.74 761.96,860.74 759.87,859.13 758.26,857.04 757.26,854.61 756.91,852 756.91,481 757.26,478.39 757.91,476.81 757.91,473.09 647.37,473.09 644.76,472.74 642.33,471.74 640.24,470.13 639.87,469.76 638.26,467.67 637.26,465.24 636.91,462.63 636.91,71.54 133.34,71.47 132.91,71.43 128.78,71.7 124.29,72.59 119.95,74.06 115.85,76.09 112.04,78.63 108.6,81.65 105.59,85.09 103.04,88.89 101.02,93 99.55,97.33 98.73,101.46 98.73,101.56 98.63,102.13 98.61,102.47 98.58,102.47 98.52,102.84 98.39,104.14 98.19,104.78 98.1,105.36 98.1,1388.74 98.05,1389.17 98.32,1393.3 99.22,1397.79 100.69,1402.13 102.71,1406.23 105.26,1410.04 108.27,1413.48 111.71,1416.5 115.52,1419.04 119.62,1421.06 123.96,1422.53 128.45,1423.43 132.58,1423.7
GND_SIGNAL on GND (split plane): 2795.86,1423.32 2797.13,1422.94 2797.12,1422.92 2799.07,1422.53 2803.41,1421.06 2807.51,1419.04 2811.32,1416.5 2814.76,1413.48 2817.77,1410.04 2820.32,1406.23 2822.34,1402.13 2823.81,1397.79 2824.71,1393.3 2824.71,1393.25 2824.73,1393.25 2824.86,1391.91 2824.92,1391.73 2824.93,1391.58 2824.93,1388.7 2824.93,107.89 2825.12,105.98 2825.27,104.44 2825.15,102.63 2824.53,98.75 2824.18,96.96 2822.7,92.62 2820.68,88.52 2818.14,84.71 2815.12,81.27 2811.68,78.26 2807.87,75.71 2803.77,73.69 2799.43,72.22 2794.95,71.32 2792.65,71.17 2792.43,71.21 2791.7,71.43 2790.49,71.55 2789.3,71.76 2788.54,71.74 2787.78,71.82 2203.09,71.74 2203.09,516.82 2278.13,591.87 2279.74,593.96 2280.74,596.39 2281.09,599 2281.09,832 2281.09,885 2280.74,887.61 2280.45,888.32 2279.74,890.04 2278.13,892.13 2256.09,914.18 2256.09,1184 2255.74,1186.61 2254.74,1189.04 2253.13,1191.13 2202.13,1242.13 2200.04,1243.73 2197.61,1244.74 2195,1245.09 1916.18,1245.09 1904.09,1257.18 1904.09,1423.65 2794.55,1423.65
GND on GND (split plane): 133.02,1423.65 1883.91,1423.65 1883.91,1253 1884.26,1250.39 1885.27,1247.96 1886.87,1245.87 1904.87,1227.87 1906.96,1226.27 1909.39,1225.26 1912,1224.91 2190.82,1224.91 2235.91,1179.82 2235.91,910 2236.26,907.39 2237.26,904.96 2238.87,902.87 2260.91,880.82 2260.91,832 2260.91,826 2260.91,603.18 2185.87,528.13 2184.26,526.04 2183.26,523.61 2182.91,521 2182.91,71.74 133.34,71.47 132.91,71.43 128.78,71.7 124.29,72.59 119.95,74.06 115.85,76.09 112.04,78.63 108.6,81.65 105.59,85.09 103.04,88.89 101.02,93 99.55,97.33 98.73,101.46 98.73,101.56 98.63,102.13 98.61,102.47 98.58,102.47 98.52,102.84 98.39,104.14 98.19,104.78 98.1,105.36 98.1,1388.74 98.05,1389.17 98.32,1393.3 99.22,1397.79 100.69,1402.13 102.71,1406.23 105.26,1410.04 108.27,1413.48 111.71,1416.5 115.52,1419.04 119.62,1421.06 123.96,1422.53 128.45,1423.43 132.58,1423.7

## Other copper
Top Layer:
  region net VCC3.3V: 993.99,925 979,910.01 979,854.45 998.13,835.32 1123.48,835.32 1137.34,849.17 1137.34,912.66 1125,925
  region net VBUS: 1492.83,1373 1371,1373 1363,1365 1363,1343.13 1373.13,1333 1493.98,1333 1503,1342.02 1503,1365.88
  region net VCC3.3V: 1563.5,1164.47 1563.5,1069 1614.47,1069 1614.47,1164.47
  region net GND: 1144,1004 1137.34,997.34 1137.34,927.43 1148,916.77 1168.77,916.77 1175.25,923.25 1175.25,994.37 1165.62,1004
  region net VCC_MAIN: 1077,1201 1068,1192 1068,1139 1082,1125 1160,1125 1171,1136 1171,1191 1161,1201
  region net 3V3_M: 864.98,877.57 880.98,861.57 920.86,861.57 941.36,882.07 941.36,957.64 927.57,971.43 880.43,971.43 864.98,955.98
  region net VCC_MAIN: 706,1201 693,1188 693,1160 705,1148 808,1148 817.65,1157.65 817.65,1189.35 806,1201
  region net VDD3V3: 670,809 661,800 661,777.25 663.96,774.29 686.29,774.29 695,783 695,803 689,809
  region net VCC_CAHRGE: 525,748 525,766 520.51,770.49 508,770.49 508,768 503,763 503,748
  region net VBUS: 787.9,1403.9 769.38,1385.38 769.38,1341.58 781.16,1329.8 886.2,1329.8 909,1307 1042,1307 1048,1313 1048,1338 1061.68,1351.68 1132.68,1351.68 1142,1361 1142,1390 1128.1,1403.9
Bottom Layer:
  region net VCC3.3V: 1085,918 1085,839 1090,834 1132.5,834 1141,842.5 1141,917 1134.83,923.17 1091,923.17
  region net VBUS: 1492.83,1373 1371,1373 1363,1365 1363,1343.13 1373.13,1333 1493.98,1333 1503,1342.02 1503,1365.88
  region net GND: 2163.73,819.12 2163.73,812.73 2163.73,795.27 2177,782 2237,782 2253,798 2253,825 2242,836 2184,836
  region net VCC3.3V: 2090,826 2039.93,826 2026.18,812.24 2026.18,767.82 2045,749 2091.57,749 2107,764.43 2104.62,766.8 2104.62,810.45
  region net GND: 921.53,1160 904,1142.47 904,1001 971,934 988,934 1000,946 1000,1018 1019,1037 1019,1085 999,1105 999,1153 992,1160
  region net VCC_MAIN: 1085,1205 1072,1192 1072,1178 1083,1167 1165,1167 1170,1172 1170,1196 1161,1205
  region net VCC_MAIN: 706,1201 693,1188 693,1160 705,1148 808,1148 817.65,1157.65 817.65,1189.35 806,1201
  region net GND: 565,722 553,710 553,666.26 562.26,657 673,657 680,664 680,715 672,723
  region net VBAT: 139,1150 124,1135 124,1107 136,1095 205,1095 211.62,1101.62 211.62,1135.38 197,1150
  region net GND: 1667,1331 1657,1321 1657,1256.12 1670.99,1242.13 1748.13,1242.13 1756,1250 1756,1264 1747,1273 1711,1273 1697,1287 1697,1321 1687,1331
  region net VCC_MAIN: 578,862 570,854 570,827 580,817 668,817 677,826 677,853 668,862
GND (plane layer: these items are gaps in the copper):
  lines w20: 1894,1436 1894,1253 1912,1235 2195,1235 2246,1184 2246,910 2271,885 2271,826 ; 2220,60 2193,60 2193,521 2271,599 2271,832
POWER (plane layer: these items are gaps in the copper):
  lines w20: 647,57 647,462.63 647.37,463 768,463 768,491 ; 746,1436 746,1239 1227,1239 1270,1282 1632.2,1282 1632.2,1436 ; 767,481 767,852 956,852 956,985 910,985 910,1113 ; 895,1239 667,1239 667,1113 1031,1113 1031,1067 1173,1067 1173,1239 ; 1894,1433 1894,1252 1911,1235 2196,1235 2246,1185 2246,911 2271,886 2271,599.11 2194,522.11 2194,79 2220,53

## Silkscreen, mask and mechanical layers (free items; w line width, h text height)
Bottom Overlay:
  text "SEC_AUDIO_1.0.0" at 764,1155 h40

## Text inside footprints (layer, text, board x,y; h text height)
1: Top Overlay "2" at 2166.91,300.47 h40 r90; Top Overlay "4" at 2166.91,80.47 h40 r90; Top Overlay "3" at 1916.91,80.47 h40 r90
2: Top Overlay "3" at 1487.68,80.47 h40 r90; Top Overlay "4" at 1737.68,80.47 h40 r90; Top Overlay "1" at 1487.68,300.47 h40 r90
3: Top Overlay "4" at 1308.45,80.47 h40 r90; Top Overlay "1" at 1058.45,300.47 h40 r90; Top Overlay "2" at 1308.45,300.47 h40 r90
4: Top Overlay "2" at 879.23,300.47 h40 r90; Top Overlay "1" at 629.23,300.47 h40 r90; Top Overlay "3" at 629.23,80.47 h40 r90
5: Top Overlay "3" at 200,80.47 h40 r90; Top Overlay "4" at 450,80.47 h40 r90; Top Overlay "1" at 200,300.47 h40 r90; Top Overlay "2" at 450,300.47 h40 r90
AUDIO: Mechanical 21 "2" at 2467,514.43 h25 r180; Mechanical 21 "3" at 2467,120.72 h25 r180; Mechanical 21 "4" at 2459,414.33 h25 r180; Mechanical 21 "1" at 2672.18,315.57 h25 r90
BAT: Bottom Overlay "+" at 392.18,996.56 h120
CT1: Top Overlay "+" at 2443.83,866 h25 r270
CT2: Top Overlay "+" at 2629,866 h25 r270
S_SWD: Top Overlay "o" at 907,470.57 h40 r180
S_UART: Top Overlay "o" at 438,1098.53 h50
STM_SWD: Top Overlay "o" at 999,312.43 h40